# EAGLE board FM_Transmitter_Eagle_PCB (EAGLE 9.6.2)
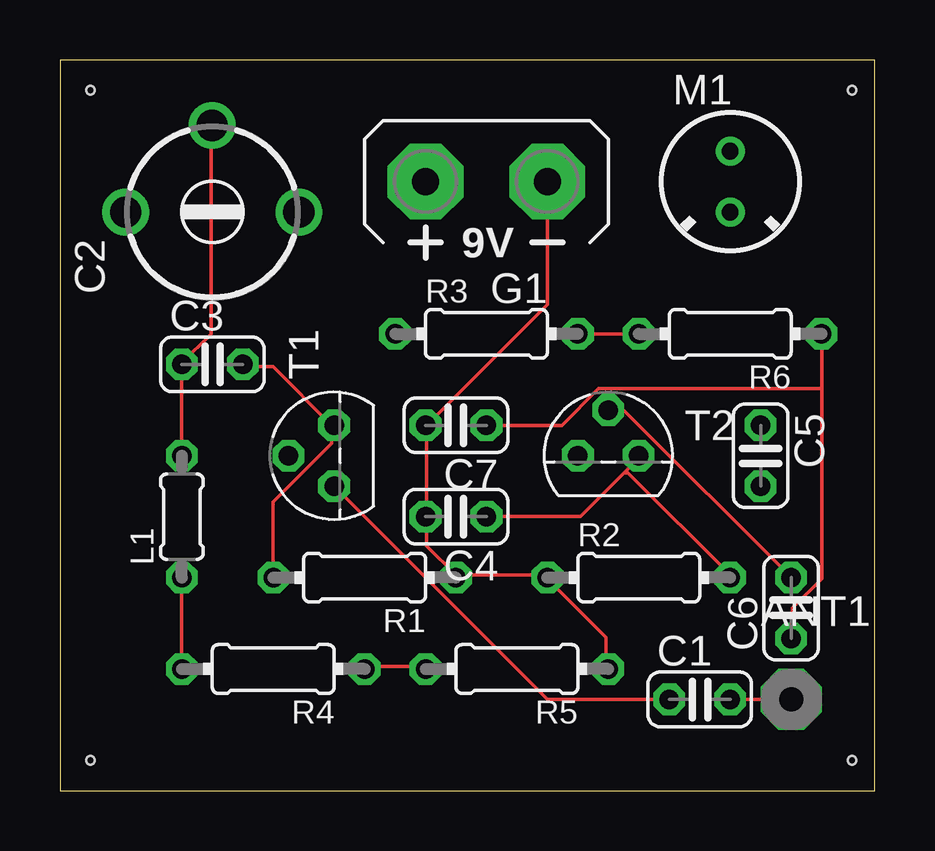
[diagram p0: board, top side]
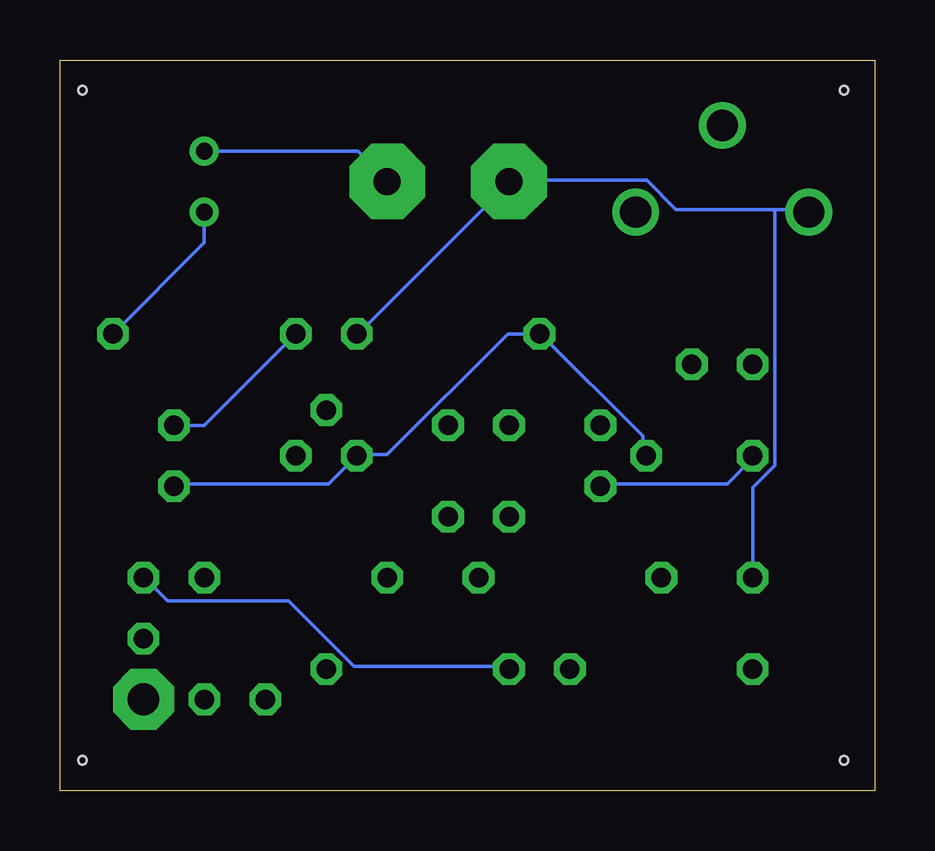
[diagram p1: board, bottom side, seen from below]

Size 33.96 x 30.47 mm. Coordinates in mm from the lower left corner, seen from the top.
Outline: 0,0 33.96,0 33.96,30.47 0,30.47 0,0
Copper layers (1*16): Top 0.035mm / dielectric 1.5mm / Bottom 0.035mm
Design rules "default": minimum track width 6mil, minimum drill 0.35mm, track to track 6mil, track to pad 6mil, pad to pad 6mil, via to via 6mil, smd to smd 6mil, copper to edge 40mil, drill to drill 6mil, minimum pad ring 10mil, minimum via ring 8mil, stop-mask expansion 4mil, vias tented up to drill 0mil, thermal gap 10mil
Holes 0.35 mm at 33.02,29.21 1.27,29.21 1.27,1.27 33.02,1.27

## Footprints (pad centres in the part's own frame; a part is rotated, then mirrored left to right if it is on the bottom)
PAD-01 = drill 1.321 pad 2.54 octagon: 1 0,0
C025-024X044 = drill 0.813 octagon: 1 -1.27,0; 2 1.27,0
CTRIM808-BC = drill 1.3: 1 -3.607,0; 2 0,3.607; 3 3.607,0
AB9V = drill 1.118 pad 3.15 octagon: + 0,2.54; - 0,-2.54
0204/5 = drill 0.813 octagon: 1 -2.54,0; 2 2.54,0
F6050AP = drill 0.7 pad 1.2: 1 0,1.27; 2 0,-1.27
0204/7 = drill 0.813 octagon: 1 -3.81,0; 2 3.81,0
TO92 = drill 0.813 octagon: 1 1.27,0; 2 0,1.905; 3 -1.27,0

## Placement (x,y rotation side)
ANT1  [PAD-01]  30.48,3.81 0 top
C1  0.022p  [C025-024X044]  26.67,3.81 0 top
C2  45p  [CTRIM808-BC]  6.35,24.13 0 top
C3  5p  [C025-024X044]  6.35,17.78 0 top
C4  0.5u  [C025-024X044]  16.51,11.43 180 top
C5  0.2u  [C025-024X044]  29.21,13.97 270 top
C6  10u  [C025-024X044]  30.48,7.62 90 top
C7  0.047u  [C025-024X044]  16.51,15.24 180 top
G1  AB9V  [AB9V]  17.78,25.4 90 top
L1  0.156u  [0204/5]  5.08,11.43 90 top
M1  ELECTRET_MICROPHON-F6050AP  [F6050AP]  27.94,25.4 0 top
R1  100  [0204/7]  12.7,8.89 180 top
R2  1k  [0204/7]  24.13,8.89 0 top
R3  4.7k  [0204/7]  17.78,19.05 0 top
R4  27k  [0204/7]  8.89,5.08 180 top
R5  27k  [0204/7]  19.05,5.08 180 top
R6  2.7k  [0204/7]  27.94,19.05 180 top
T1  BC547  [TO92]  11.43,13.97 90 top
T2  BC547  [TO92]  22.86,13.97 0 top

## Library data of the parts
ANT1 = discrete
C1-C7 = rcl; SPICEPREFIX: C
G1 = battery
L1 = rcl; SPICEPREFIX: L
M1 = microphon
R1-R6 = rcl; SPICEPREFIX: R
T1 T2 = transistor

## Nets
0: C4.2 C7.2 G1.- M1.1 R1.1 R2.1 R5.1
N$1: ANT1.1 C1.2
N$2: C6.1 C7.1 M1.2 R6.1
N$3: C1.1 C2.2 C3.1 L1.2 T1.3
N$4: C3.2 R1.2 T1.1
N$5: C4.1 R2.2 T2.1
N$6: C5.2 R3.1 T1.2 T2.3
N$7: C6.2 R4.1 R5.2 T2.2
N$8: C2.1 C5.1 G1.+ L1.1 R3.2 R4.2 R6.2

## Tracks (layer width: path | path; a pad name or v marks a point on that pad's centre or on a via)
0
  Top 0.152: 15.29,11.43 15.29,10.21 16.51,8.99 | 15.29,11.43 15.29,15.24 | 15.29,11.43 C4.2 | 16.51,8.99 20.32,8.99 R2.1 20.32,8.84 22.76,6.4 22.76,5.18 R5.1 | 16.51,8.99 R1.1 | G1.- 20.32,20.27 15.29,15.24 | 15.29,15.24 C7.2
  Bottom 0.152: M1.1 21.54,26.67 20.32,25.45 G1.-
N$1
  Top 0.152: ANT1.1 C1.2
N$2
  Top 0.152: R6.1 31.75,16.76 | 31.75,16.76 31.75,8.84 30.53,7.62 30.53,6.4 C6.1 | C7.1 20.93,15.24 22.45,16.76 31.75,16.76
  Bottom 0.152: M1.2 27.94,22.86 R6.1
N$3
  Top 0.152: L1.2 C3.1 5.08,17.83 6.3,19.05 6.3,27.74 C2.2 | C1.1 20.32,3.81 T1.3
  Bottom 0.152: T1.3 11.33,12.8 6.15,12.8 5.08,13.87 L1.2
N$4
  Top 0.152: 11.33,15.24 8.89,17.68 7.67,17.68 C3.2 | R1.2 8.89,12.04 11.33,14.48 11.33,15.24 | 11.33,15.24 T1.1
N$5
  Top 0.152: C4.1 21.69,11.43 23.52,13.26 | 23.52,13.26 24.13,13.87 T2.1 | 23.52,13.26 23.67,13.26 27.94,8.99 R2.2
N$6
  Bottom 0.152: C5.2 29.16,12.8 22.76,12.8 T2.3 21.54,14.02 20.32,14.02 15.29,19.05 R3.1 13.92,19.05 9.65,14.78 9.65,14.02 T1.2
N$7
  Top 0.152: R4.1 12.7,5.18 15.14,5.18 R5.2 | C6.2 23.52,15.85 22.91,15.85 T2.2
  Bottom 0.152: R5.2 15.29,5.18 21.69,5.18 24.44,7.92 29.46,7.92 30.38,8.84 C6.2
N$8
  Top 0.152: R6.2 R3.2 | L1.1 R4.2
  Bottom 0.152: C5.1 27.94,15.24 R6.2 | 4.17,24.23 8.28,24.23 9.5,25.45 15.14,25.45 G1.+ 15.29,25.3 21.54,19.05 R3.2 | 4.17,24.23 2.79,24.23 C2.1 | L1.1 5.08,12.65 4.17,13.56 4.17,24.23